# EAGLE board Esquema (EAGLE 9.6.2)
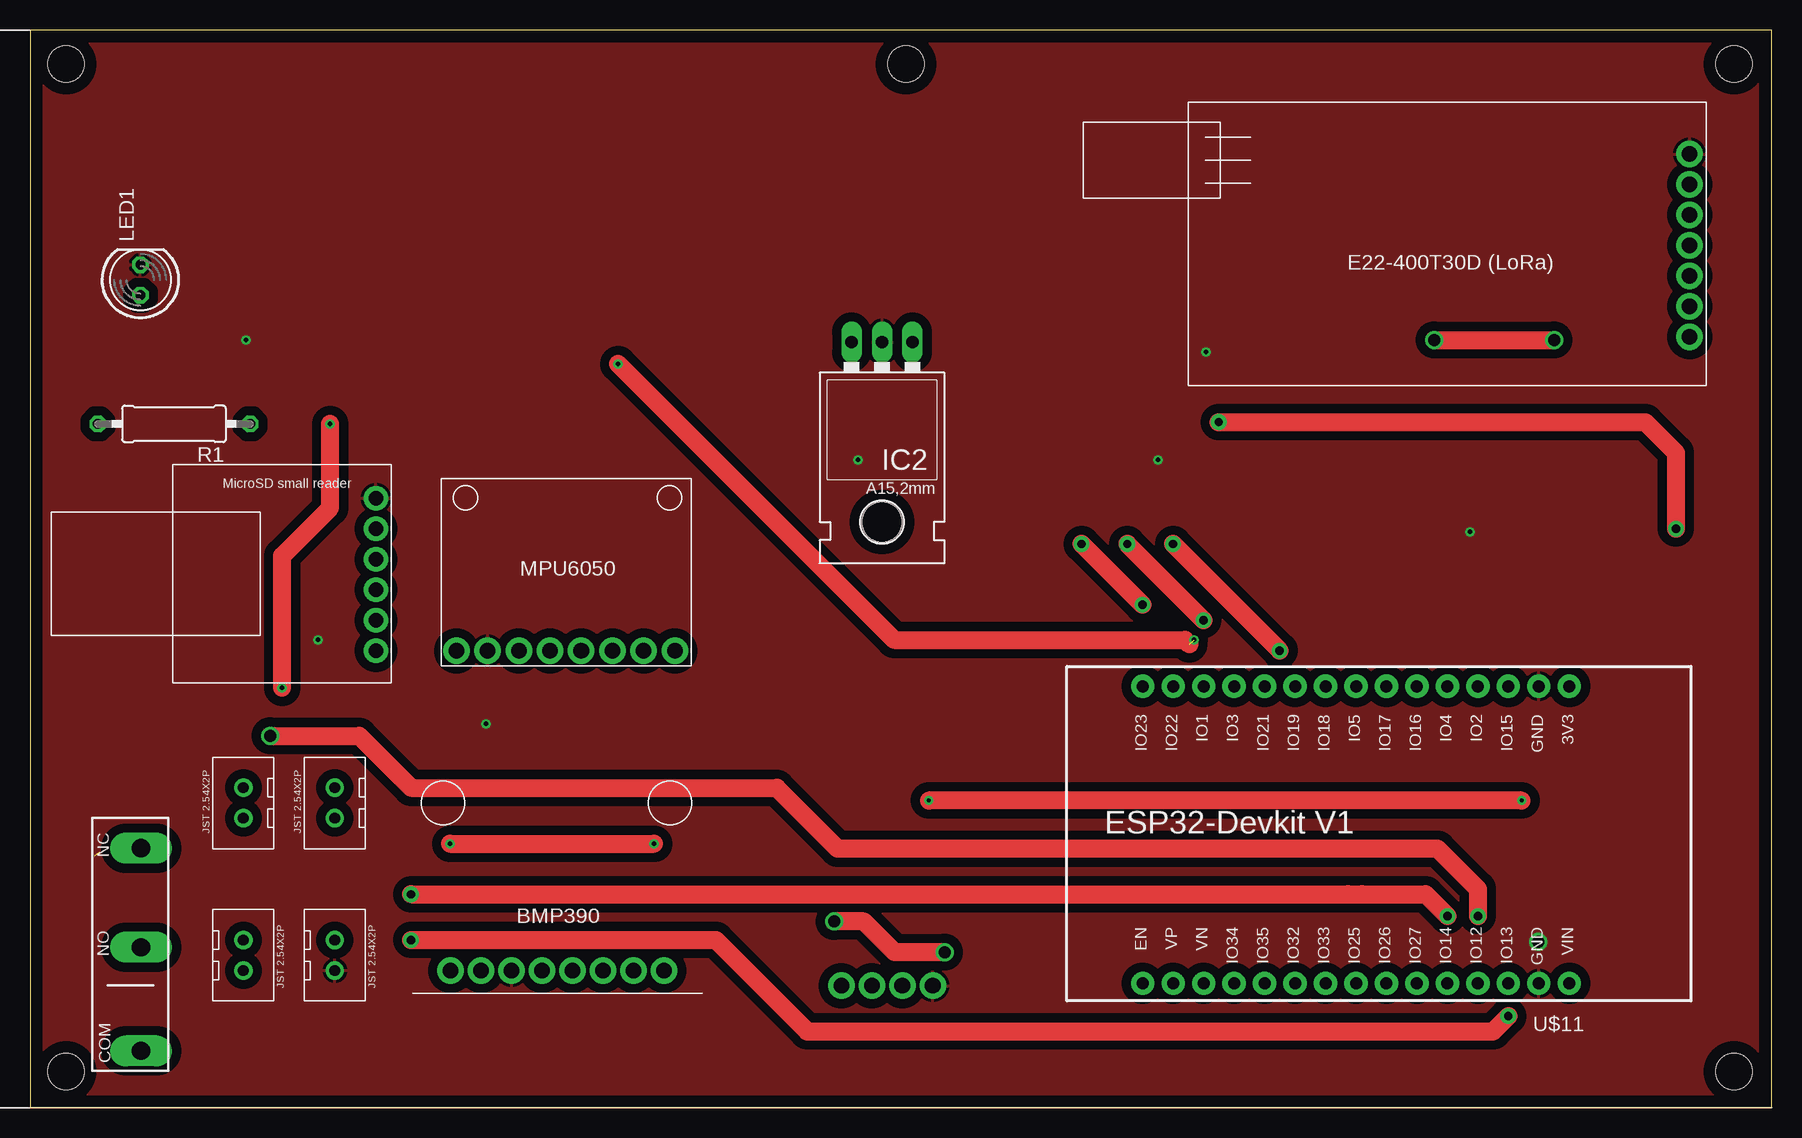
[diagram p0: board, top side]
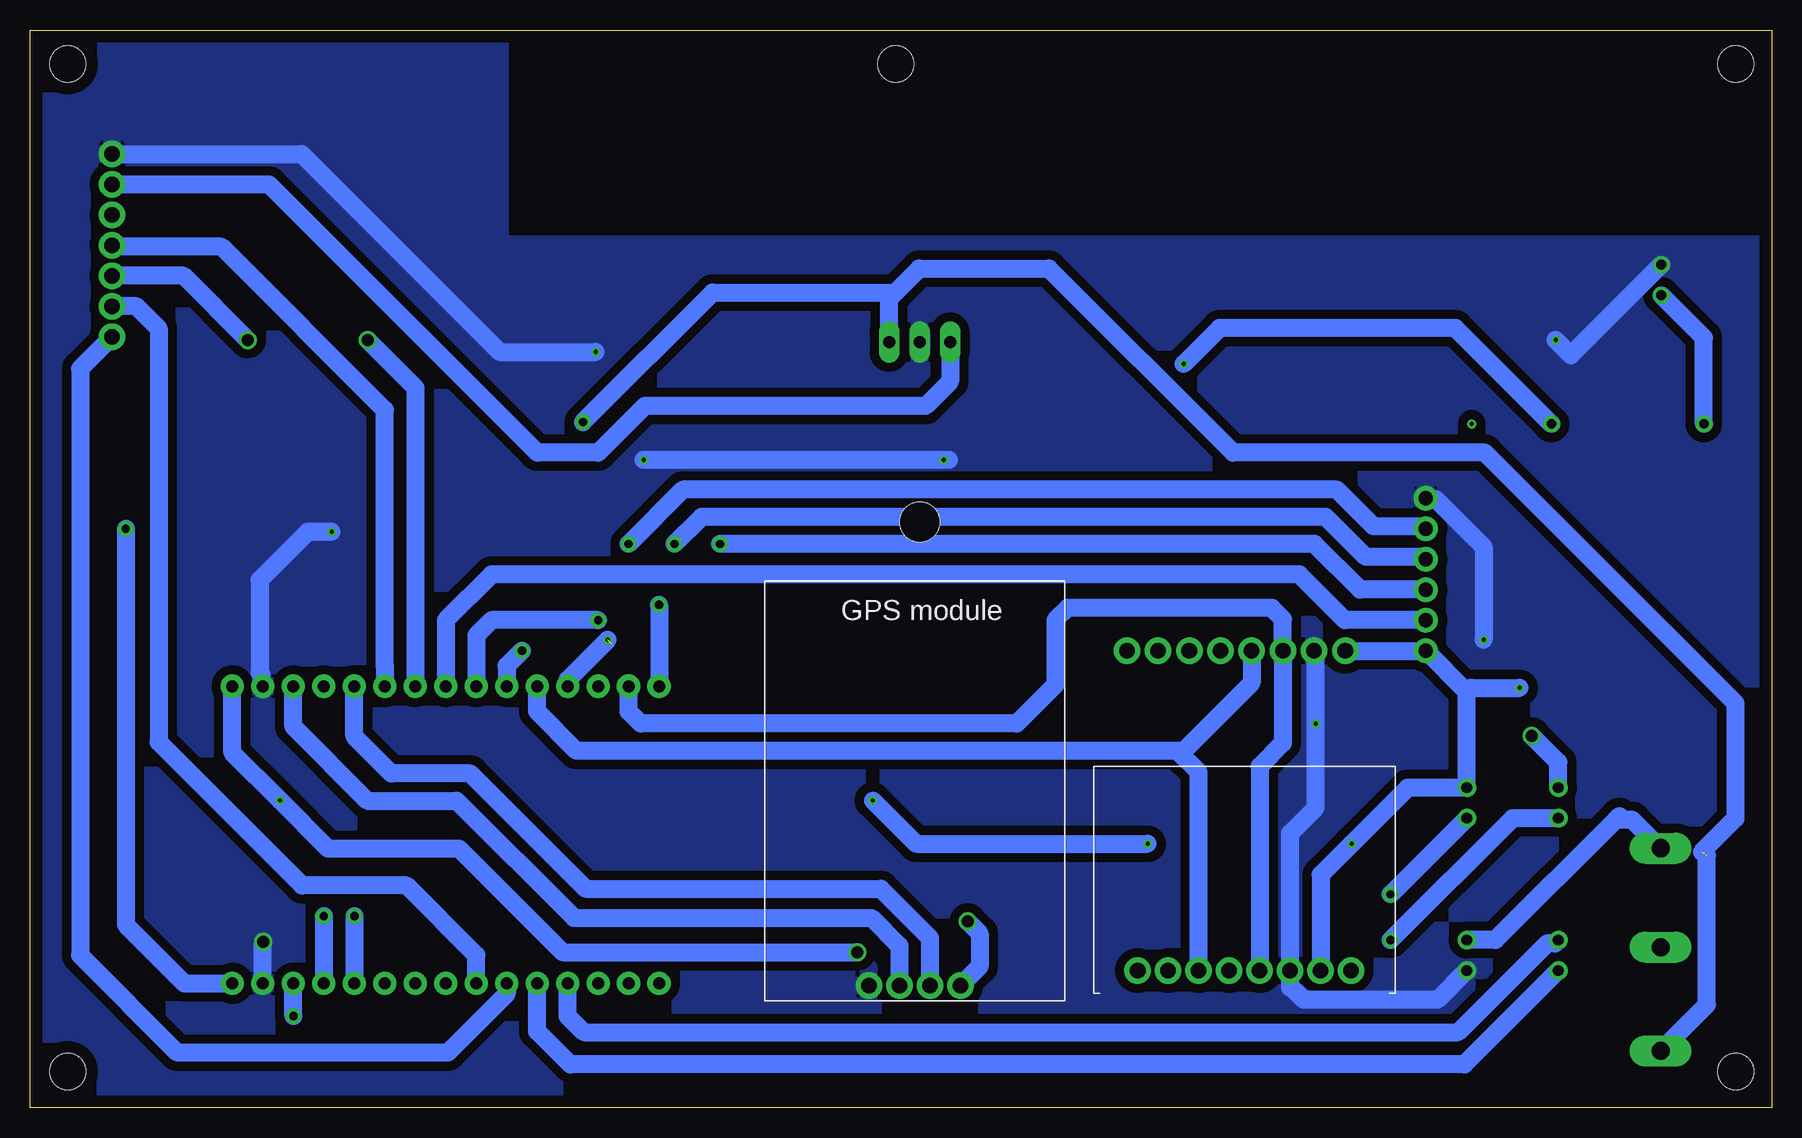
[diagram p1: board, bottom side, seen from below]

Size 145.14 x 89.84 mm. Coordinates in mm from the lower left corner, seen from the top.
Outline: 0,0 145.14,0 145.14,89.84 0,89.84 0,0
Copper layers (1*16): Top 0.035mm / dielectric 1.5mm / Bottom 0.035mm
Design rules "padronizacao do eagle": minimum track width 1.5mm, minimum drill 0.35mm, track to track 30mil, track to pad 20mil, pad to pad 6mil, via to via 6mil, smd to smd 6mil, copper to edge 40mil, drill to drill 6mil, minimum pad ring 10mil, minimum via ring 8mil, stop-mask expansion 4mil, vias tented up to drill 0mil, thermal gap 10mil
Holes 3 mm at 142,87 142,3 3,3 3,87 73,87

## Footprints (pad centres in the part's own frame; a part is rotated, then mirrored left to right if it is on the bottom)
78XXL = drill 1.016 long: GND 0,-3.81; IN -2.54,-3.81; OUT 2.54,-3.81 | hole 3.302: 0,11.176
LED5MM = drill 0.813 octagon: A -1.27,0; K 1.27,0
0309/12 = drill 0.813 octagon: 1 -6.35,0; 2 6.35,0
BMP390_FOOTPRINT = drill 1.3: 3V0 -5.969,-8.382; CS 6.731,-8.382; GND -3.429,-8.382; INT 9.271,-8.382; SCL -0.889,-8.382; SDA 4.191,-8.382; SDO 1.651,-8.382; VIN -8.509,-8.382
E22-400T30D_FOOTPRINT = drill 1.3: AUX -16.383,-0.762; GND -16.383,-5.842; M0 -16.383,9.398; M1 -16.383,6.858; RXD -16.383,4.318; TXD -16.383,1.778; VCC -16.383,-3.302
GPS_MODULE_FOOTPRINT = drill 1.3: GND -4.01,-16.51; RX 1.07,-16.51; TX -1.47,-16.51; VCC 3.61,-16.51
JST2.54X2P_FOOTPRINT = drill 0.9: 1 -1.27,0; 2 1.27,0
MICROSD_SMALL_READER_FOOTPRINT = drill 1.2: 3V3 -7.239,6.35; CLK -7.239,-1.27; CS -7.239,3.81; GND -7.239,-6.35; MISO -7.239,-3.81; MOSI -7.239,1.27
MPU6050_FOOTPRINT = drill 1.3: ADO 6.686,-10.184; GND -6.314,-10.184; INT 9.286,-10.184; SCL -3.715,-10.184; SDA -1.115,-10.184; VCC -8.915,-10.184; XCL 4.085,-10.184; XDA 1.486,-10.184
ESP32-DEVKITV1 = drill 1 pad 1.93: 1 -22.87,-13.54; 2 -20.33,-13.54; 3 -17.79,-13.54; 4 -15.25,-13.54; 5 -12.71,-13.54; 6 -10.17,-13.54; 7 -7.63,-13.54; 8 -5.09,-13.54; 9 -2.55,-13.54; 10 -0.01,-13.54; 11 2.53,-13.54; 12 5.07,-13.54; 13 7.61,-13.54; 14 10.15,-13.54; 15 12.69,-13.54; 16 12.69,11.23; 17 10.15,11.23; 18 7.61,11.23; 19 5.07,11.23; 20 2.53,11.23; 21 -0.01,11.23; 22 -2.55,11.23; 23 -5.09,11.23; 24 -7.63,11.23; 25 -10.17,11.23; 26 -12.71,11.23; 27 -15.25,11.23; 28 -17.79,11.23; 29 -20.33,11.23; 30 -22.87,11.23
CHAVESS-5GL = drill 1.524 pad 1.778 long: P$1 -9.271,-0.254; P$2 -0.635,-0.254; P$3 7.62,-0.254

## Placement (x,y rotation side)
IC2  [78XXL]  71,60 180 top
LED1  [LED5MM]  9.2,69 90 top
R1  [0309/12]  12,57 180 top
U$1  BMP390V1  [BMP390_FOOTPRINT]  43.56,19.81 0 top
U$2  E22-400T30D  [E22-400T30D_FOOTPRINT]  121.92,73.66 180 top
U$3  GPS_MODULE  [GPS_MODULE_FOOTPRINT]  71.22,26.67 0 bottom
U$4  JST2.54X2P  [JST2.54X2P_FOOTPRINT]  25.4,25.4 90 top
U$5  JST2.54X2P  [JST2.54X2P_FOOTPRINT]  17.78,12.7 270 top
U$6  JST2.54X2P  [JST2.54X2P_FOOTPRINT]  17.78,25.4 90 top
U$7  JST2.54X2P  [JST2.54X2P_FOOTPRINT]  25.4,12.7 270 top
U$8  MICROSD_SMALL_READER  [MICROSD_SMALL_READER_FOOTPRINT]  21.59,44.45 180 top
U$9  MPU6050V1  [MPU6050_FOOTPRINT]  44.45,48.26 0 top
U$11  ESP32DEVKITV1  [ESP32-DEVKITV1]  105.41,21.59 180 top
U$12  CHAVE_SS-5GL  [CHAVESS-5GL]  9,14 90 top

## Library data of the parts
IC2 = v-reg
LED1 = led
R1 = rcl; SPICEPREFIX: R
U$1-U$9 U$12 = CRD
U$11 = ESP32-DEVKITV1

## Nets
GND: IC2.GND LED1.K U$1.GND U$2.GND U$3.GND U$7.2 U$8.GND U$9.GND U$11.2 U$11.29
N$1: U$1.SDA U$9.SDA U$11.11
N$2: U$1.SCL U$9.SCL U$11.14
N$3: U$1.3V0 U$3.VCC U$4.2 U$8.3V3 U$9.VCC U$11.1
N$4: LED1.A R1.2
N$5: U$3.RX U$11.5
N$6: U$3.TX U$11.3
N$7: IC2.IN U$11.30 U$12.P$1
N$8: U$2.RXD U$11.7
N$9: U$2.TXD U$11.6
N$10: U$2.M1 U$11.22
N$11: U$2.M0 U$11.21
N$12: IC2.OUT U$2.VCC
N$13: U$8.CS U$11.8
N$14: U$8.MOSI U$11.15
N$15: U$8.CLK U$11.9
N$16: U$8.MISO U$11.10
N$17: R1.1 U$11.12
N$19: U$6.1 U$11.28
N$20: U$6.2 U$11.27
N$21: U$4.1 U$11.26
N$22: U$5.1 U$11.19
N$23: U$5.2 U$11.20
V_BATTERY: U$7.1 U$12.P$3

## Tracks (layer width: path | path; a pad name or v marks a point on that pad's centre or on a via)
GND  (via drill 0.35, 1 pad 1.3)
  Bottom 1.5: U$7.2 27.83,9 39,9 40,10 40.13,10 U$1.GND 40.13,22.87 38,25 v38,32 38,37.94 U$9.GND | 68.56,54 v69,54 v94,54 | v120,48 122,48 126,44 126,36.27 125.86,36.13 125.86,35.26 U$11.2 | U$2.GND 122.5,79.5 106,63 v98,63 | U$8.GND 28.74,50.71 27.96,50.71 24,46.75 v24,39 | U$11.29 125.74,13.76 v125.7,13.8 | v18,64 16.73,62.73 15.23,64.23 | LED1.K 15.23,64.23 | 15.23,64.23
  pour Bottom: 1,1 144,1 144,89 106,89 106,72 1,72
  pour Top: 1,89 1,1 144,1 144,89
N$1
  Bottom 1.5: U$1.SDA 47.75,27.97 49.53,29.75 | U$9.SDA 43.34,35.4 48.99,29.75 49.53,29.75 | U$11.11 102.88,33.03 99.6,29.75 49.53,29.75
N$2
  Bottom 1.5: U$1.SCL 42.67,28.45 40.74,30.38 U$9.SCL 40.74,40.74 41.66,41.66 58.67,41.66 59.69,40.64 59.69,35.24 62.92,32.01 94.25,32.01 95.25,33.02 U$11.14
N$3  (via drill 0.35, 1 pad 1.3)
  Top 1.5: v124.3,25.6 v74.9,25.6 | v35,22 v52,22 | v76.21,12.96 72.05,12.96 69.48,15.52 v67,15.52 | v21,35 21,46 25,50 v25,57
  Bottom 1.5: v76.21,12.96 100.75,12.96 109.39,21.59 120.29,21.59 v124.3,25.6 128.28,29.58 U$11.1 | U$9.VCC 28.85,38.08 U$8.3V3 25.4,34.67 | 25.4,34.67 U$4.2 30.33,26.67 v35,22 37.59,19.41 U$1.3V0 | v74.9,25.6 71.3,22 v52,22 | v67,15.52 66,14.52 66,11.77 U$3.VCC | 25.4,34.67 25.07,35 v21,35
N$4
  Bottom 1.5: R1.2 5.65,64.18 LED1.A
N$5
  Bottom 1.5: U$11.5 118.12,30.95 115.02,27.85 108.45,27.85 98.84,18.24 74.24,18.24 70.15,14.15 U$3.RX
N$6
  Bottom 1.5: U$11.3 123.2,31.76 117.03,25.59 109.59,25.59 99.8,15.8 75,15.8 72.69,13.49 U$3.TX
N$7  (via drill 0.7 pad 1.3)  (1 unrouted)
  Top 1.5: v137.16,48.26 137.16,54.61 134.62,57.15 v99.06,57.15
  Bottom 1.5: v137.16,48.26 137.16,15.24 132.28,10.36 U$11.30 | v99.06,57.15 88.25,67.96 73.04,67.96 | 5.82,21.31 3.02,24.11 3.02,33.73 23.9,54.61 44.88,54.61 60.23,69.96 71.04,69.96 73.04,67.96 | IC2.IN 73.54,67.46 73.04,67.96 | U$12.P$1 5.41,8.58 5.41,21
N$8  (via drill 1 pad 1.3)
  Top 1.5: v117,64 v127,64
  Bottom 1.5: U$11.7 113,35.17 113,60 v117,64 | v127,64 132.34,69.34 U$2.RXD
N$9
  Bottom 1.5: 115.57,36.83 115.57,58.17 129.17,71.77 138.19,71.77 U$2.TXD | 115.58,36.82 115.57,36.83 | 115.57,36.83 U$11.6
N$10
  Bottom 1.5: U$2.M1 136.27,66.8 134.43,64.96 134.43,30.48 122.46,18.51 113.76,18.51 107.95,12.7 U$11.22
N$11
  Bottom 1.5: U$11.21 105.42,9.48 110.32,4.58 132.85,4.58 140.97,12.7 140.97,61.59 U$2.M0
N$12
  Bottom 1.5: U$2.VCC 125.22,76.96 102.87,54.61 97.79,54.61 93.9,58.5 70.5,58.5 68.46,60.54 IC2.OUT
N$13
  Bottom 1.5: U$8.CS 35.56,40.64 39.37,44.45 106.68,44.45 110.49,40.64 U$11.8
N$14  (via drill 0.7 pad 1.3)
  Top 1.5: v87.63,46.99 v92.71,41.91
  Bottom 1.5: U$8.MOSI 34.29,43.18 38.1,46.99 v87.63,46.99 | v92.71,41.91 v92.72,41.9 U$11.15
N$15  (via drill 0.7 pad 1.3)
  Top 1.5: v97.79,40.64 v91.44,46.99
  Bottom 1.5: U$8.CLK 29.02,45.91 33.82,45.91 37.16,49.25 89.18,49.25 v91.44,46.99 | v97.79,40.64 106.68,40.64 107.95,39.37 U$11.9
N$16  (via drill 0.7 pad 1.3)
  Top 1.5: v104.14,38.1 v95.25,46.99
  Bottom 1.5: U$8.MISO 29.02,48.45 33.16,48.45 36.23,51.51 90.73,51.51 v95.25,46.99 | v104.14,38.1 105.42,36.82 U$11.10
N$17  (via drill 0.35)  (1 unrouted)
  Top 1.5: v49,62 72,39 96.23,39 96.62,38.62
  Bottom 1.5: R1.1 26.35,65 46,65 v49,62 | v97,39 100.34,35.66 U$11.12
N$19  (via drill 0.7 pad 1.3)
  Top 1.5: v31.75,13.97 57.15,13.97 64.77,6.35 121.92,6.35 v123.19,7.62
  Bottom 1.5: v31.75,13.97 21.59,24.13 U$6.1 | v123.19,7.62 U$11.28
N$20  (via drill 0.7 pad 1.3, 1 pad 1.3)
  Top 1.5: v120.66,15.98 120.66,18.23 117.3,21.59 67.31,21.59 62.23,26.67 31.75,26.67 27.42,31 v20,31
  Bottom 1.5: v120.66,15.98 U$11.27 | U$6.2 17.78,28.78 v20,31
N$21  (via drill 0.7 pad 1.3)
  Top 1.5: v118.11,15.97 116.3,17.78 111,17.78 109.83,17.78 v31.75,17.78
  Bottom 1.5: U$4.1 v31.75,17.78 | v118.11,15.97 v118.12,15.96 U$11.26
N$22
  Bottom 1.5: U$5.1 18.06,13.69 18.72,13.69 26.13,6.28 98.99,6.28 100.34,7.63 U$11.19
N$23
  Bottom 1.5: U$5.2 25.62,3.59 100.11,3.59 102.88,6.36 U$11.20
V_BATTERY
  Bottom 1.5: U$7.1 23.03,13.97 13,24 | 12.69,24.31 13,24 | U$12.P$3 11.63,24 13,24